# Altium PCB Charger_PCB.PcbDoc
Units mm, origin at the board's own origin, x right, y up, seen from the top; angles counter-clockwise.
Board outline 179.58 x 65.53 mm, 2 copper layers (Top Layer, Bottom Layer); 25 components, 24 nets, 128 pads, 1 vias.
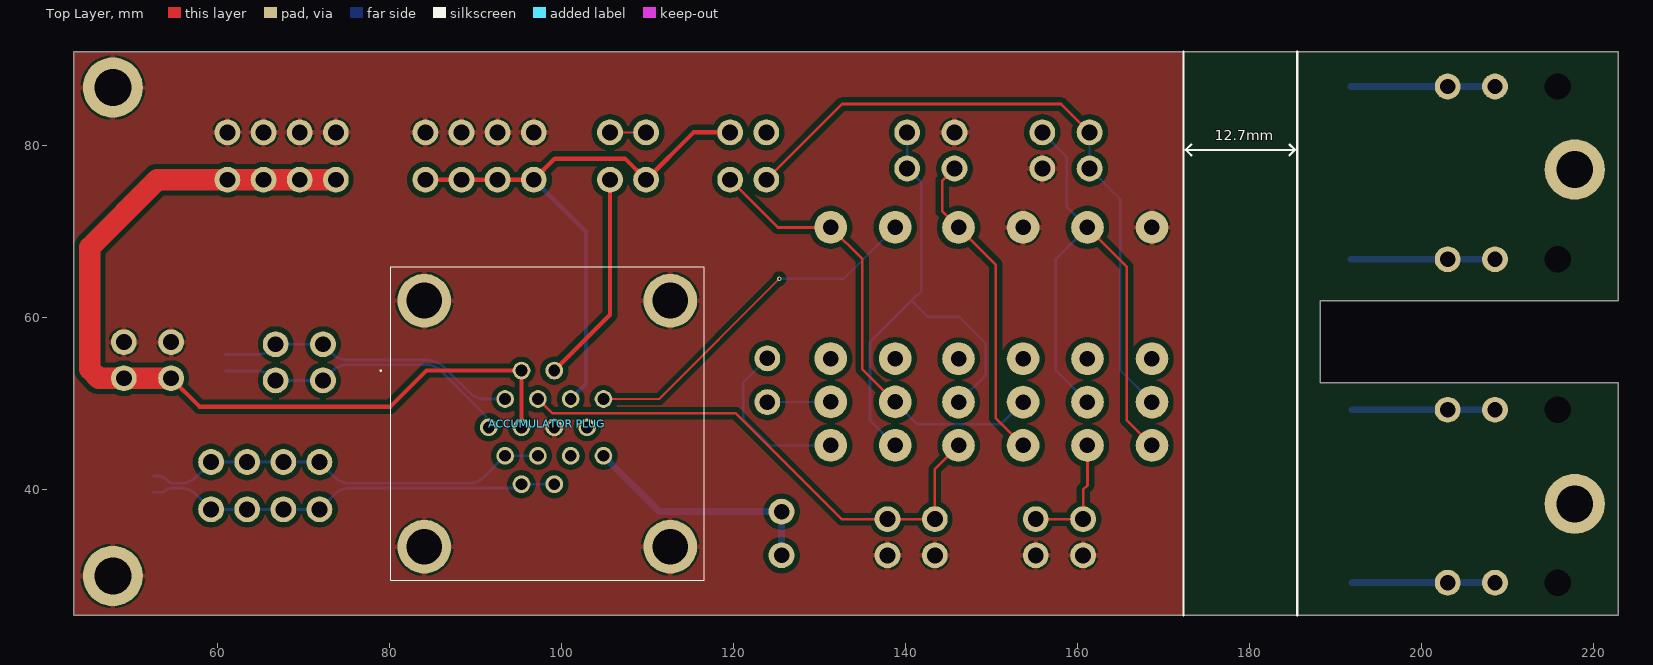
[diagram p0: Top Layer view]
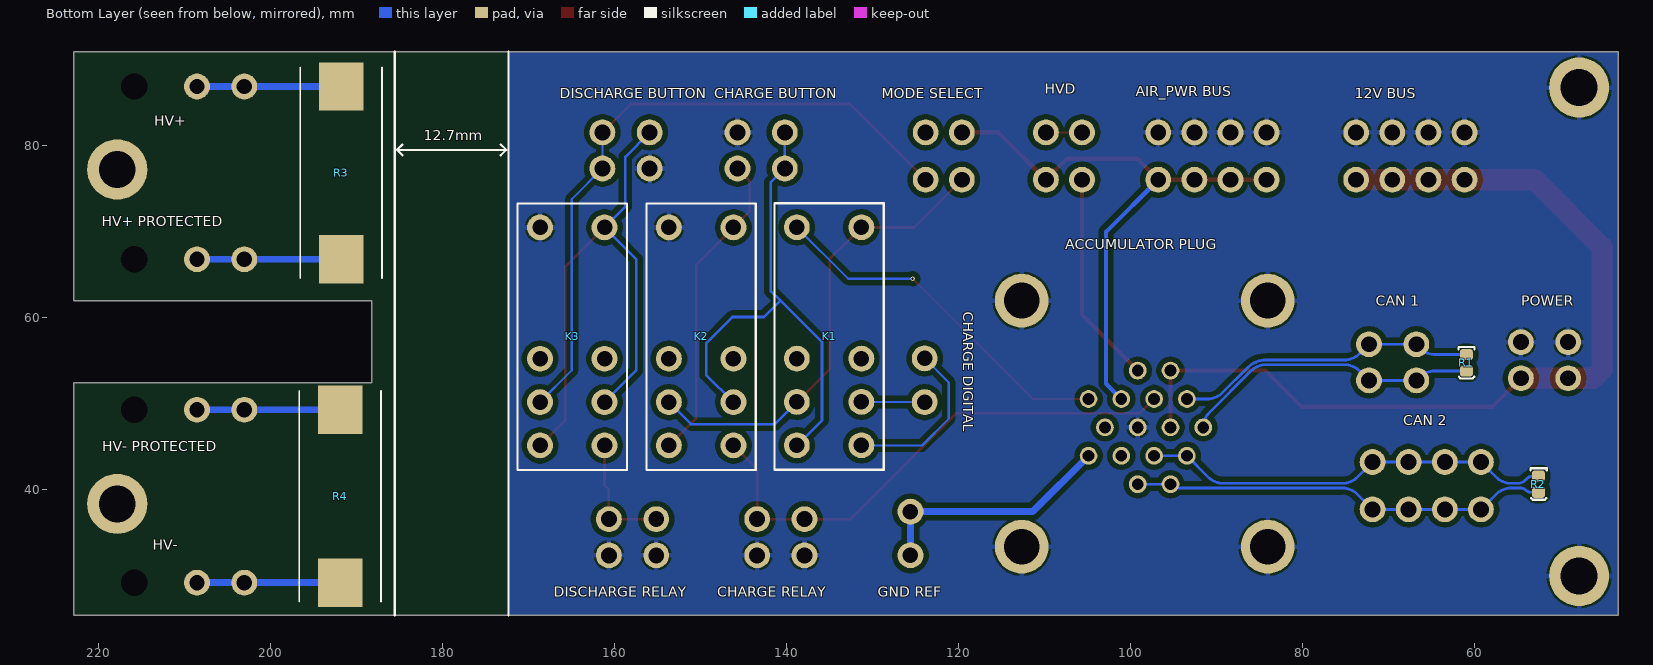
[diagram p1: Bottom Layer view, seen from below]
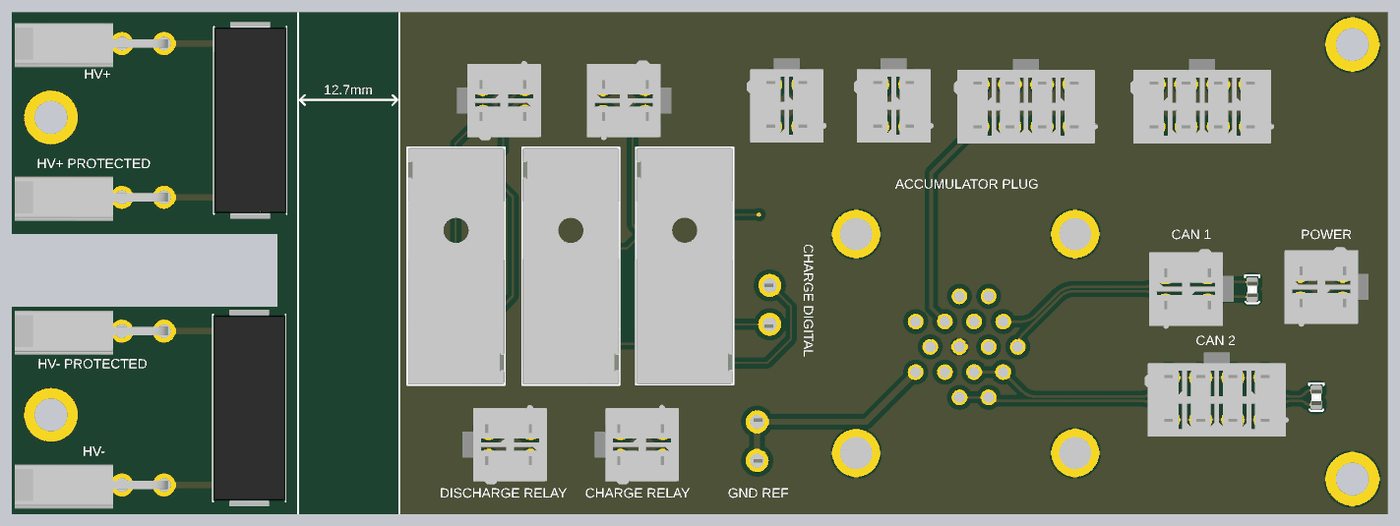
[diagram p2: 3D render of the assembled board from below, using the file's embedded part models]

## Layer stack, top to bottom
Top Solder: solder mask 0.0102, Solder Resist, Dk 3.5
Top Layer: signal copper 0.0356
Dielectric 1: dielectric 0.32, FR-4, Dk 4.8
Bottom Layer: signal copper 0.0356
Bottom Solder: solder mask 0.0102, Solder Resist, Dk 3.5

## Board outline
43.307,25.4 43.307,90.932 222.885,90.932 222.885,61.976 188.214,61.976 188.214,52.451 222.885,52.451 222.885,25.4

## Design rules (kind name [scope] priority, off if disabled: settings)
Clearance [All] p1: gap=0.254 ignorepadtopadclearanceinfootprint=FALSE except(0: Arc-Hole Track-Hole SMDPad-Hole THPad-Hole Via-Hole Fill-Hole Region-Hole Text-Hole; 0.1: THPad-THPad; 0.152: Arc-SMDPad Track-SMDPad SMDPad-SMDPad; 0.2: Arc-THPad Track-THPad SMDPad-THPad THPad-Via; 0.203: Arc-Arc Arc-Track Arc-Region Track-Track Track-Region SMDPad-Region THPad-Region Via-Region Fill-Region Poly-Region Region-Region; 0.6: Arc-Poly Track-Poly SMDPad-Poly THPad-Poly Via-Poly Fill-Poly Poly-Poly)
DiffPairsRouting [All] p1: maxlimit=0.22 minlimit=0.22 mostfreqgap=0.22 toplayer_minwidth=0.33 toplayer_maxwidth=0.33 toplayer_prefwidth=0.33 bottomlayer_minwidth=0.33 bottomlayer_maxwidth=0.33 bottomlayer_prefwidth=0.33 maxuncoupledlength=12.7
Height [All] p1: minheight=0 maxheight=50 prefheight=12.7
HoleSize [All] p1: absolutevalues=TRUE maxlimit=10 minlimit=0.025 maxpercent=80.000 minpercent=20.000
MinimumSolderMaskSliver [All] p1 off: minsoldermaskwidth=0.254
NetAntennae [All] p1 off: netantennaetolerance=0
PlaneClearance [All] p1: clearance=0.4
PlaneConnect [All] p1: pad.planeconnectstyle=Relief pad.reliefexpansion=0.508 pad.reliefentries=4 pad.reliefconductorwidth=0.8 pad.reliefairgap=0.254 via.planeconnectstyle=Direct via.reliefexpansion=0.508 via.reliefentries=4 via.reliefconductorwidth=0.8 via.reliefairgap=0.254
PolygonConnect [All] p1: thpad.connectstyle=Relief thpad.reliefconductorwidth=0.6 thpad.reliefentries=4 thpad.polygonreliefangle="90 Angle" thpad.airgapwidth=0.254 smdpad.connectstyle=Relief smdpad.reliefconductorwidth=0.6 smdpad.reliefentries=4 smdpad.polygonreliefangle="90 Angle" smdpad.airgapwidth=0.254 via.connectstyle=Direct via.reliefconductorwidth=0.6 via.reliefentries=4 via.polygonreliefangle="90 Angle" via.airgapwidth=0.254
RoutingVias [All] p1: holewidth=0.25 width=0.55 viastyle="Through Hole" minholewidth=0.203 minwidth=0.254 maxholewidth=0.711 maxwidth=1.27
SilkToSilkClearance [All] p1 off: silktosilkclearance=0.254
SilkToSolderMaskClearance [IsPad] p1 off: minsilkscreentomaskgap=0.254 clearancetoexposedcopper=TRUE
SolderMaskExpansion [All] p1: expansion=0.051 istentingtop=FALSE
Width [All] p1: maxlimit=3 minlimit=0.127 preferedwidth=0.152 minimp=50.000000 maximp=50.000000 favimp=50.000000
21 further rules are at their usual default settings.

## Classes and differential pairs
differential pair CAN_2: +CAN_2_P -CAN_2_N
differential pair CAN_1: +CAN_1_P -CAN_1_N

## Components (designator, comment, footprint, x,y, rotation, side; value= is the part's Value field where it differs from the comment)
"12V BUS" "39293086" 39293086 61.196,76.034 r180 bottom
"ACCUMULATOR PLUG" "1-207303-5" 12073035 95.377,53.848 r0 top
"AIR_PWR BUS" "39293086" 39293086 84.201,76.034 r180 bottom
"CAN 1" "39293046" 39293046 72.302,52.705 r270 bottom
"CAN 2" "39293086" 39293086 59.291,37.719 r180 bottom
"CHARGE BUTTON" "39293046" 39293046 145.708,77.334 r270 bottom
"CHARGE DIGITAL" "39293026" 39293026 123.952,52.725 r0 bottom
"CHARGE RELAY" "39293046" 39293046 137.922,36.576 r90 bottom
"DISCHARGE BUTTON" "39293046" 39293046 155.917,81.534 r90 bottom
"DISCHARGE RELAY" "39293046" 39293046 155.155,36.576 r90 bottom
"GND REF" "39293026" 39293026 125.603,34.916 r180 bottom
HV+ "39300020" 39300020 208.534,86.868 r270 bottom
"HV+ PROTECTED" "39300020" 39300020 208.534,66.785 r270 bottom
HV- "39300020" 39300020 208.534,29.193 r270 bottom
"HV- PROTECTED" "39300020" 39300020 208.534,49.293 r270 bottom
HVD "39293046" 39293046 105.664,76.034 r180 bottom
K1 "1860991-1" 1860991-1 135.061,70.505 r0 bottom
K2 "1860991-1" 1860991-1 149.927,70.485 r0 bottom
K3 "1860991-1" 1860991-1 164.913,70.485 r0 bottom
"MODE SELECT" "39293046" 39293046 119.634,76.034 r180 bottom
POWER "39293046" 39293046 54.649,52.959 r270 bottom
R1 "120R" 0805 60.96,54.737 r270 bottom
R2 "120R" 0805 52.578,40.64 r270 bottom
R3 "15k" TE_SMF7 191.77,76.835 r90 bottom
R4 "15k" TE_SMF7 191.897,39.243 r270 bottom

## Footprints (in the part's own frame and the unit in brackets; to place one, negate y for a bottom-side part, rotate by r counter-clockwise, add the part's x,y. Pads: shape width x height; smd on the part's side, far side on the other; paste and mask are expansions set on the pad)
0805 [mm]
  rrect50% 1.3x1.5 smd: 1(-0.962,-0.026) 2(0.938,-0.026)
  silkscreen extent -1.85,-0.95 1.8,0.93, body extent -1,-0.65 1,0.66, height 0.73
1860991-1 [mm] "Relay Socket 5A"
  round 3 / inner round 3 / far side round 3.8 hole 1.8: 1(-3.75,0) 4(-3.75,20.3) 6(-3.75,25.34) 8(-3.75,15.26) 9(3.75,15.26) 11(3.75,25.34) 13(3.75,20.3) 16(3.75,0)
  silkscreen extent -6.35,-2.79 6.35,28.19, body extent -6.32,-2.78 6.33,28.18, height 8.9
12073035 [mil]
  round 80.98 hole 54: 1(0,0) 2(150,0) 3(-75,-130) 4(75,-130) 5(225,-130) 6(375,-130) 7(-150,-260) 8(0,-260) 9(150,-260) 10(300,-260) 11(-75,-390) 12(75,-390) 13(225,-390) 14(375,-390) 15(0,-520) 16(150,-520)
  round 245.98 hole 164: MH1(-445,320) MH2(680.98,320) MH3(680.98,-805.98) MH4(-445,-805.98)
  silkscreen extent -646,-961 836,474, body extent -600,-980 835,455, height 1343
39293026 [mm]
  round 3 hole 1.8: 1(0,2.54) 2(0,-2.54)
  body extent -3,-5.9 3.2,5.1, height 12.8
39293046 [mm]
  round 3 hole 1.85: 1(0,0) 2(0,5.5) 3(-4.2,0) 4(-4.2,5.5)
  body extent -7.3,-2.1 3.1,8.9, height 3.5
39293086 [mm]
  round 3 hole 1.85: 1(0,0) 2(0,5.5) 3(-4.2,0) 4(-4.2,5.5) 5(-8.4,0) 6(-8.4,5.5) 7(-12.6,0) 8(-12.6,5.5)
  body extent -15.7,-2.2 3.1,8.8, height 2.99
39300020 [mm]
  round 3 hole 1.8: 1(0,0) 2(0,5.5)
  round 1.524 hole 3.05: ""(0,-7.3)
  body extent -2.7,-13.97 3.1,5.97, height 11.4
TE_SMF7 [mm]
  rect 5.6x5.2 smd: 1(-10.05,0) 2(10.05,0)
  silkscreen extent -12.25,-4.75 12.25,4.75, body extent -12.25,-4.75 12.25,4.75, height 9.9

## Part data
"12V BUS" "AIR_PWR BUS" "CAN 2": Digikey Part Number=WM3846-ND, Angle=0, Contact=Tin, Flange=No, Part Number=39293086, Pitch=4.2mm, Positions=8, Row Spacing=5.5mm
"ACCUMULATOR PLUG": "Connector", Manufacturer_Name="TE Connectivity", Mouser Part Number=571-1-207303-5, Arrow Part Number=1-207303-5, Arrow Price/Stock=https://www.arrow.com/en/products/1-207303-5/te-connectivity, Datasheet Link=https://www.arrow.com/en/products/1-207303-5/te-connectivity, Height=34.417mm, Manufacturer_Part_Number=1-207303-5, Mouser Price/Stock=https://www.mouser.co.uk/ProductDetail/TE-Connectivity/1-207303-5?qs=GQ3BsEl46pk51%252B5f3zYlzg%3D%3D
"CAN 1" "CHARGE BUTTON" "CHARGE RELAY" "DISCHARGE BUTTON" "DISCHARGE RELAY" HVD "MODE SELECT" POWER: Digikey Part Number=WM3844-ND, Angle=0, Contact=Tin, Flange=No, Part Number=39293046, Pitch=4.2mm, Positions=4, Row Spacing=5.5mm
"CHARGE DIGITAL" "GND REF": Digikey Part Number=WM3843-ND, Angle=0, Contact=Tin, Flange=No, Part Number=39293026, Pitch=4.2mm, Positions=2, Row Spacing=5.5mm
HV+ "HV+ PROTECTED" HV- "HV- PROTECTED": Digikey Part Number=WM21351-ND, Angle=90, Contact=Tin, Flange=No, Part Number=39300020, Pitch=4.2mm, Positions=2, Row Spacing=5.5mm
K1 K2 K3: "RT78602 RELAY SOCKET PCB 5MM", Digikey Part Number=41-1860991-1-ND, Manufacturer="TE Connectivity", Digikey Link=https://www.digikey.com.au/en/products/detail/te-connectivity-potter-brumfield-relays/1860991-1/11192373, Part Number=1860991-1
R1 R2: library part RC0805FR07120RL, Digikey Part Number=311-120CRCT-ND, Manufacturer=YAGEO, Rated Power=0.125W, Tolerance=0.01, Material=FR-07, Part Number=RC0805FR07120RL
R3 R4: library part SMF715KJ, Manufacturer=TE, Rated Power=7W, Tolerance=0.05, Material="Metal Film", Part Number=SMF715KJ

## Free pads (board coordinates)
  round 7 hole 4.3 unplated: 1(217.805,77.216) 2(217.805,38.354) 3(47.879,29.972) 4(47.879,86.741)

## Via types
v1: diameter 0.55, hole 0.25, Top Layer to Bottom Layer, 1 vias

## Nets (pads, with @x,y where several pads share a name; then routed paths per layer and width w, separated by ;. In a path a pad name is that pad's centre, name@x,y a point inside that pad or via, vN(x,y) a via of type N, cw(c..) or ccw(c..) an arc to the next point about the centre after c; other vN are vias at no path point)
12V: "12V BUS.1" "12V BUS.3" "12V BUS.5" "12V BUS.7" "ACCUMULATOR PLUG.1" "ACCUMULATOR PLUG.8" POWER.1 POWER.2 | length 106.3
  Top Layer w0.5: POWER.1 57.951,49.657 80.137,49.657 84.328,53.848 95.377,53.848 95.377,47.244
  Top Layer w2.5: POWER.1 POWER.2 46.228,52.959 45.212,53.975 45.212,68.199 53.047,76.034 61.196,76.034 65.396,76.034 69.596,76.034 73.796,76.034
AIR_PWR: "ACCUMULATOR PLUG.5" "AIR_PWR BUS.1" "AIR_PWR BUS.3" "AIR_PWR BUS.5" "AIR_PWR BUS.7" "MODE SELECT.2" HVD.3 | length 68.7
  Top Layer w0.508: 84.201,76.034 88.401,76.034 92.601,76.034 96.801,76.034 ; 96.647,75.88 96.801,76.034 ; 119.634,81.534 115.364,81.534 HVD.3 107.412,78.486 99.253,78.486 96.801,76.034
  Bottom Layer w0.508: 96.801,76.034 102.87,69.965 102.87,52.324 101.092,50.546
CAN_1_N: "ACCUMULATOR PLUG.3" "CAN 1.3" "CAN 1.4" R1.1 | length 35.2
  Bottom Layer w0.33: R1.1 64.544,55.699 ccw(c64.544,58.239) 66.34,56.443 66.802,56.905 72.302,56.905 73.383,55.824 ccw(c75.179,57.62) 75.179,55.08 84.245,55.08 cw(c84.245,51.99) 86.43,54.175 89.315,51.29 ccw(c91.111,53.086) 91.111,50.546 93.472,50.546
CAN_1_P: "ACCUMULATOR PLUG.7" "CAN 1.1" "CAN 1.2" R1.2 | length 35
  Bottom Layer w0.33: R1.2 64.656,53.799 cw(c64.656,51.259) 66.452,53.055 66.802,52.705 72.302,52.705 73.383,53.786 cw(c75.179,51.99) 75.179,54.53 84.245,54.53 cw(c84.245,51.99) 86.041,53.786 90.849,48.978 cw(c89.114,47.244) 91.567,47.244
CAN_2_N: "ACCUMULATOR PLUG.11" "ACCUMULATOR PLUG.12" "CAN 2.2" "CAN 2.4" "CAN 2.6" "CAN 2.8" R2.1 | length 48
  Bottom Layer w0.33: R2.1 53.186,41.602 cw(c53.186,40.486) 53.975,41.275 54.163,41.087 ccw(c54.991,41.915) 54.991,40.744 55.764,40.744 ccw(c55.764,43.284) 57.56,41.488 59.291,43.219 63.491,43.219 67.691,43.219 71.891,43.219 73.622,41.488 ccw(c75.418,43.284) 75.418,40.744 89.222,40.744 ccw(c89.222,43.284) 91.018,41.488 93.472,43.942 97.282,43.942
CAN_2_P: "ACCUMULATOR PLUG.15" "ACCUMULATOR PLUG.16" "CAN 2.1" "CAN 2.3" "CAN 2.5" "CAN 2.7" R2.2 | length 48.7
  Bottom Layer w0.33: R2.2 53.55,39.702 ccw(c53.55,40.303) 53.975,39.878 cw(c54.738,39.115) 54.738,40.194 55.764,40.194 cw(c55.764,37.654) 57.56,39.45 59.291,37.719 63.491,37.719 67.691,37.719 71.891,37.719 73.622,39.45 cw(c75.418,37.654) 75.418,40.194 94.3,40.194 ccw(c94.3,41.717) 95.377,40.64 99.187,40.64
"CHARGE 5V": "CHARGE DIGITAL.1" K1.4 | length 7.4
  Bottom Layer w0.254: 123.952,50.185 K1.4@131.311,50.185
"CHARGE EN (CHARGER)": "CHARGE DIGITAL.2" K1.6 | length 19.6
  Bottom Layer w0.254: 123.972,55.245 123.952,55.265 121.158,52.471 121.158,48.26 124.273,45.145 K1.6@131.311,45.145
"CHARGE RLY PWR": "ACCUMULATOR PLUG.4" "CHARGE RELAY.1" "CHARGE RELAY.2" K2.6 | length 61.6
  Top Layer w0.308: 97.282,50.546 98.933,48.895 120.269,48.895 132.588,36.576 137.922,36.576 143.422,36.576 143.422,42.39 K2.6
CHARGE_BUTTON_OUT: "CHARGE BUTTON.1" K2.1 K2.11 | length 36.7
  Top Layer w0.308: 145.708,77.334 144.272,75.898 144.272,72.39 K2.1 150.495,66.167 150.495,48.327 K2.11
CHARGE_BUTTON_PWR: "CHARGE BUTTON.2" "CHARGE BUTTON.4" K1.11 K2.4 | length 59.6
  Bottom Layer w0.308: K1.11@138.811,45.145 135.89,48.066 135.89,57.15 140.716,61.976 ; 140.208,81.534 140.208,77.334 141.859,75.683 141.859,63.119 140.716,61.976 ; K2.4 149.352,53.36 149.352,57.023 146.304,60.071 142.621,60.071 140.716,61.976
CHARGE_GND_REF: "ACCUMULATOR PLUG.14" "GND REF.1" "GND REF.2" | length 28.5
  Bottom Layer w0.8: 104.902,43.942 111.388,37.456 125.603,37.456 125.603,32.376
CHARGE_SAFETY: "ACCUMULATOR PLUG.6" K1.16 | length 42.2
  Top Layer w0.254: 104.902,50.546 111.379,50.546 v1(125.349,64.516)
  Bottom Layer w0.254: v1(125.349,64.516) 132.842,64.516 K1.16@138.811,70.485
CHARGE_SAFETY_PWR: "MODE SELECT.1" K1.1 K1.13 K2.13 | length 54.4
  Top Layer w0.308: 119.634,76.034 125.183,70.485 131.311,70.485 135.001,66.795 135.001,53.995 K1.13@138.811,50.185
  Bottom Layer w0.308: K1.13@138.811,50.185 141.371,47.625 151.117,47.625 K2.13
"DISCHARGE RLY PWR": "DISCHARGE RELAY.1" "DISCHARGE RELAY.2" K3.6 | length 14.3
  Top Layer w0.308: 155.155,36.576 160.655,36.576 160.655,40.005 161.163,40.513 K3.6
DISCHARGE_BUTTON_OUT: "DISCHARGE BUTTON.1" K3.1 K3.4 K3.11 | length 65
  Top Layer w0.308: K3.1 165.735,65.913 165.735,48.073 K3.11
  Bottom Layer w0.308: 155.917,81.534 158.75,78.701 158.75,72.898 K3.1 157.48,66.802 157.48,53.868 K3.4
DISCHARGE_CONT_PWR: "DISCHARGE BUTTON.2" "DISCHARGE BUTTON.4" "MODE SELECT.3" K3.13 | length 76.9
  Top Layer w0.308: 123.834,76.034 132.636,84.836 158.115,84.836 161.417,81.534
  Bottom Layer w0.254: 161.417,81.534 161.417,77.334 164.973,73.778 164.973,53.875 K3.13
GND: "12V BUS.2" "12V BUS.4" "12V BUS.6" "12V BUS.8" "ACCUMULATOR PLUG.9" "ACCUMULATOR PLUG.MH1" "ACCUMULATOR PLUG.MH2" "ACCUMULATOR PLUG.MH3" "ACCUMULATOR PLUG.MH4" "AIR_PWR BUS.2" "AIR_PWR BUS.4" "AIR_PWR BUS.6" "AIR_PWR BUS.8" "CHARGE BUTTON.3" "CHARGE RELAY.3" "CHARGE RELAY.4" "DISCHARGE BUTTON.3" "DISCHARGE RELAY.3" "DISCHARGE RELAY.4" K2.16 K3.16 pad.3 pad.4 POWER.3 POWER.4
GREEN_OUT: "ACCUMULATOR PLUG.2" HVD.1 | length 24.9
  Top Layer w0.508: 99.187,53.848 105.664,60.325 HVD.1
HV+_IN: HV+.1 HV+.2 R3.2 | length 16.8
  Bottom Layer w0.8: R3.2 191.787,86.868 HV+.2 HV+.1
HV+_PROT: "HV+ PROTECTED.1" "HV+ PROTECTED.2" R3.1 | length 16.8
  Bottom Layer w0.8: R3.1 203.034,66.785 208.534,66.785
HV-_IN: HV-.1 HV-.2 R4.2 | length 16.6
  Bottom Layer w0.8: R4.2 HV-.2 HV-.1
HV-_PROT: "HV- PROTECTED.1" "HV- PROTECTED.2" R4.1 | length 16.6
  Bottom Layer w0.8: R4.1 203.034,49.293 208.534,49.293
HVD_IN: HVD.2 HVD.4 | length 4.2
  Top Layer w0.254: HVD.2 HVD.4
pads on no net: "ACCUMULATOR PLUG.10" "ACCUMULATOR PLUG.13" "HV+ PROTECTED." "HV- PROTECTED." "MODE SELECT.4" HV+. HV-. K1.8 K1.9 K2.8 K2.9 K3.8 K3.9

## Polygon pours and split planes (outlines as drawn)
GND on Top Layer "5V_TOP_1" (solid, remove dead copper, pour order 1): 43.307,25.4 172.339,25.4 172.339,90.932 43.307,90.932
GND on Bottom Layer "5V_TOP_1" (solid, remove dead copper, pour order 0): 43.307,25.4 172.339,25.4 172.339,90.932 43.307,90.932

## Silkscreen, mask and mechanical layers (free items; w line width, h text height)
Top Overlay:
  lines w0.254: 172.339,25.4 172.339,90.932 ; 173.228,78.867 172.593,79.502 ; 173.228,80.137 172.593,79.502 ; 184.658,78.867 185.293,79.502 ; 184.658,80.137 185.293,79.502 ; 185.547,25.4 185.547,90.932 ; 172.593,79.502 185.293,79.502
  text "12.7mm" at 175.968,80.21 h2
Bottom Overlay:
  lines w0.254: 172.339,25.4 172.339,90.932 ; 173.228,78.867 172.593,79.502 ; 173.228,80.137 172.593,79.502 ; 184.658,78.867 185.293,79.502 ; 184.658,80.137 185.293,79.502 ; 185.547,25.4 185.547,90.932 ; 172.593,79.502 185.293,79.502
  text "12.7mm" at 182.172,80.21 h2
Mechanical 1:
  lines w0.254: 43.307,25.4 185.547,25.4 222.885,25.4 222.885,52.451 188.214,52.451 188.214,61.976 222.885,61.976 222.885,90.932 43.307,90.932 43.307,25.4